# Altium PCB boosterboard.PcbDoc
Units mil, origin at the board's own origin, x right, y up, seen from the top; angles counter-clockwise.
Board outline 6000 x 4000 mil, 2 copper layers (Top Layer, Bottom Layer); 68 components, 50 nets, 173 pads, 0 vias.
Unrouted connection lines stored in the file: 86.
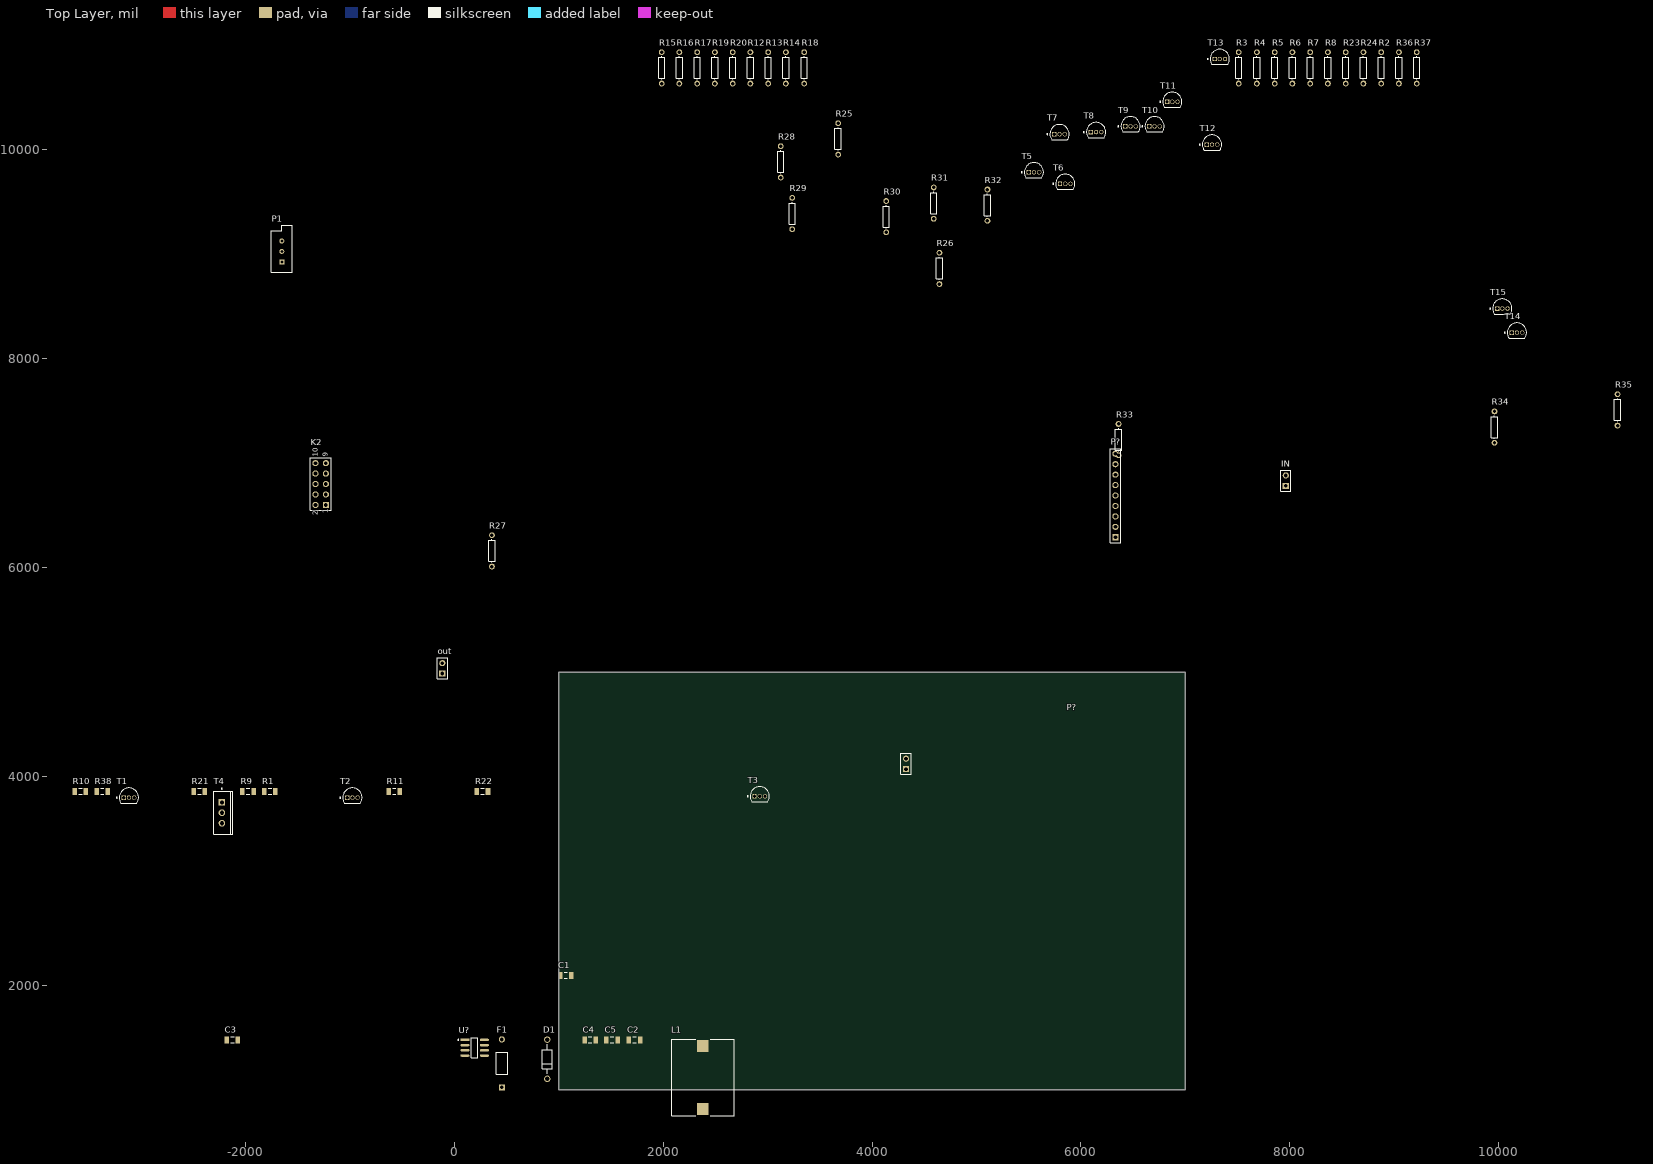
[diagram p0: Top Layer view]
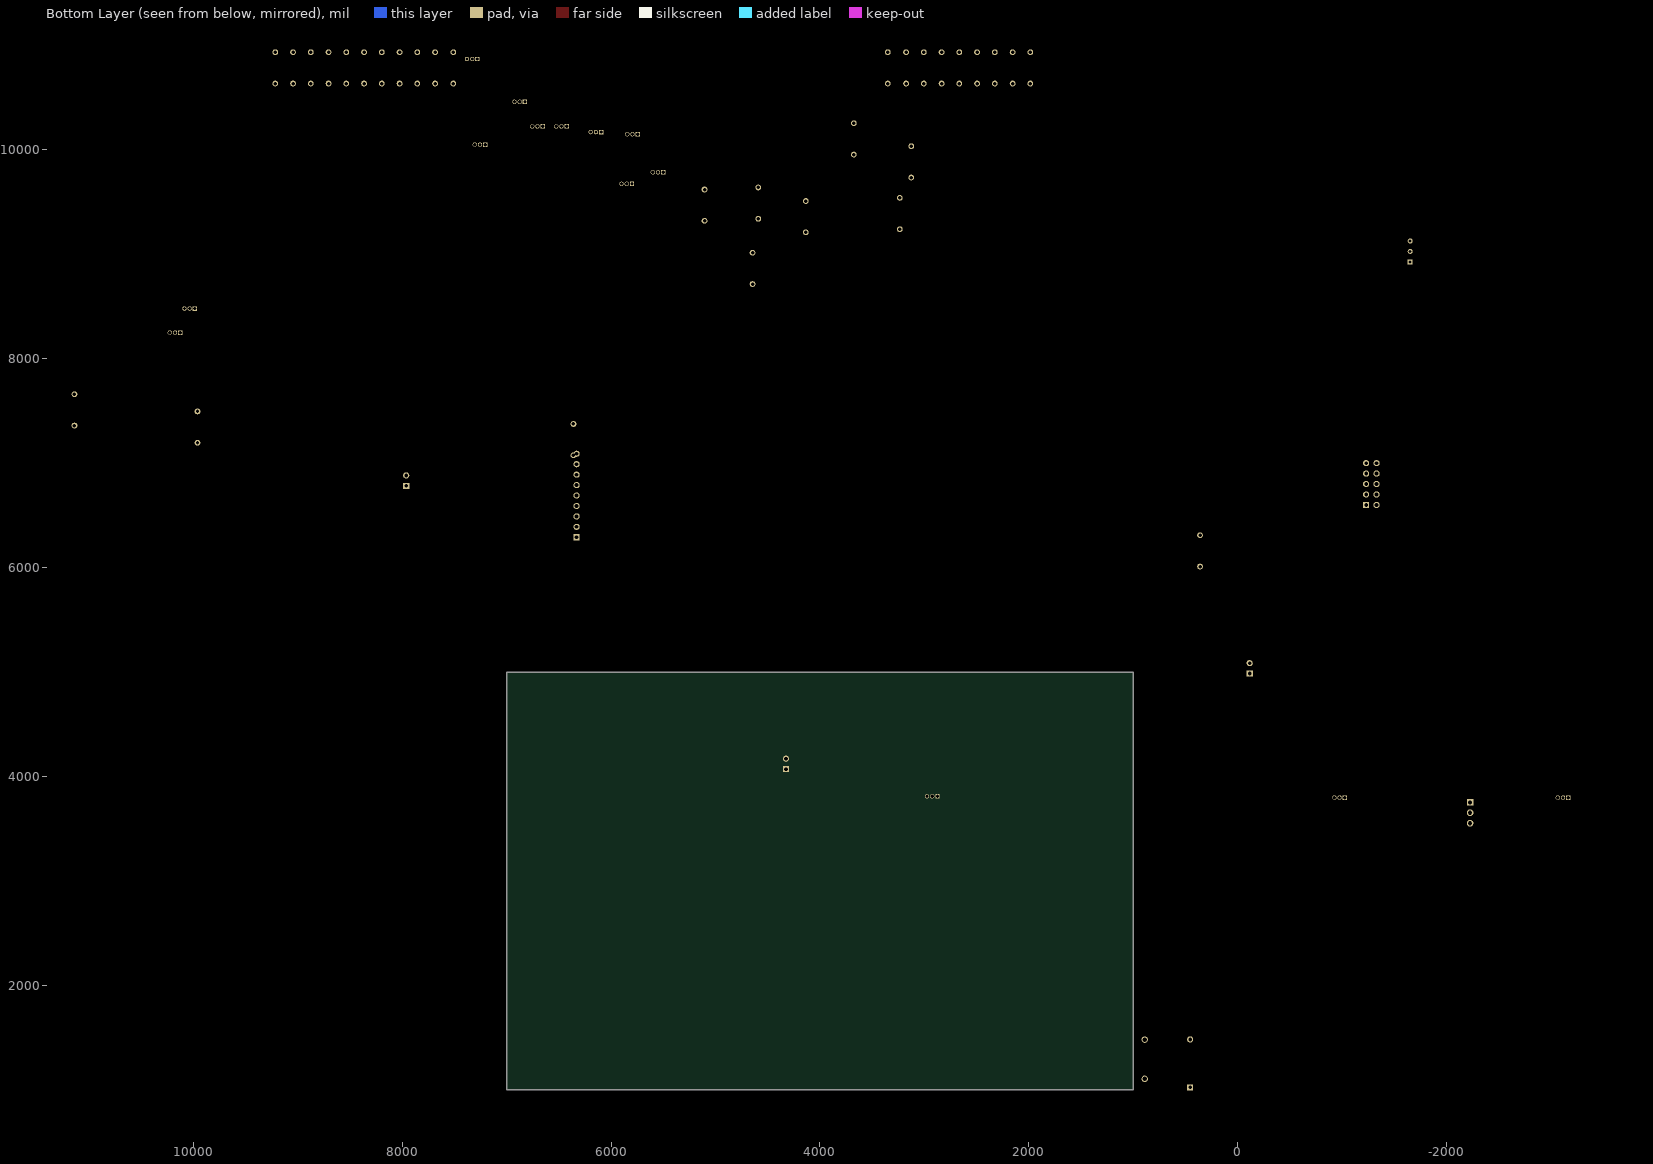
[diagram p1: Bottom Layer view, seen from below]

## Layer stack, top to bottom
Top Solder: solder mask 0.4, Solder Resist, Dk 3.5
Top Layer: signal copper 1.4
Dielectric 1: dielectric 12.6, FR-4, Dk 4.8
Bottom Layer: signal copper 1.4
Bottom Solder: solder mask 0.4, Solder Resist, Dk 3.5

## Board outline
1000,1000 7000,1000 7000,5000 1000,5000

## Design rules (kind name [scope] priority, off if disabled: settings)
Clearance [All] p1: gap=10 ignorepadtopadclearanceinfootprint=FALSE except(0: Arc-Hole Track-Hole SMDPad-Hole THPad-Hole Via-Hole Fill-Hole Poly-Hole Region-Hole Text-Hole)
PolygonConnect [All] p1: connectstyle=Relief reliefconductorwidth=10 reliefentries=4 polygonreliefangle="90 Angle" airgapwidth=10
RoomDefinition boosterdeel2 [InComponentClass('boosterdeel2')] p1: confinementstyle=ConfineIn formatcopy=TRUE lockcomponents=FALSE outline 8593.15,9165 17448.15,9165 17448.15,10810 8593.15,10810
RoomDefinition booster12-70v [InComponentClass('booster12-70v')] p2: confinementstyle=ConfineIn formatcopy=TRUE lockcomponents=FALSE outline 0,1420 8855,1420 8855,3400 0,3400
RoutingVias [All] p1: holewidth=28 width=50 viastyle="Through Hole" minholewidth=28 minwidth=50 maxholewidth=28 maxwidth=50
SolderMaskExpansion [All] p1: expansion=4 istentingtop=FALSE
Width [All] p1: maxlimit=10 minlimit=10 preferedwidth=10
30 further rules are at their usual default settings.

## Classes and differential pairs
component class boosterdeel2: IN P1 R2 R3 R4 R5 R6 R7 R8 R12 R13 R14 R15 R16 R17 R18 R19 R20 R23 R24 R25 R26 R28 R29 R30 R31 R32 R33 R34 R35 R36 R37 T5 T6 T7 T8 T9 T10 T11 T12 T13 T14 T15
component class booster12-70v: C2 C3 C4 C5 D1 F1 IN L1 out P1 R1 R9 R10 R11 R21 R22 R38 T1 T2 T4 U?

## Components (designator, comment, footprint, x,y, rotation, side; value= is the part's Value field where it differs from the comment)
C1 "Cap Semi" C1206 1066.85,2095 r0 top value=330p
C2 "Cap Semi" C1206 1725,1477.44 r0 top value=100n
C3 "Cap Semi" C1206 -2125,1477.44 r0 top value=4u7
C4 "Cap Semi" C1206 1300,1477.44 r0 top value=470u
C5 "Cap Semi" C1206 1510,1477.44 r0 top value=470u
D1 "MUR160G" ONSC-AXIAL_LEAD-2-59-10_P 890,1292.44 r90 top
F1 "Fuse 1" PIN-W2/E2.8 455,1252.44 r90 top
IN "Header 2" HDR1X2 7961.3,6782.44 r90 top
K2 "Header 5X2" HDR2X5 -1230,6600 r90 top
L1 "74459147" WE-PD3-X 2380,1117.44 r90 top
out "Header 2" HDR1X2 -115,4985 r90 top
P1 "RPot" VR5 -1651.85,9027.44 r90 top value=5k
P? "Header 2" HDR1X2 4325,4070 r90 top
P? "Header 9" HDR1X9 6330,6290 r90 top
R1 "Res1" C1206 -1765.85,3857.44 r0 top value=1K
R2 "Res1" AXIAL-0.3 8875,10785 r90 top value=1K
R3 "Res1" AXIAL-0.3 7510,10785 r90 top value=1K
R4 "Res1" AXIAL-0.3 7685,10785 r90 top value=1K
R5 "Res1" AXIAL-0.3 7855,10785 r90 top value=1K
R6 "Res1" AXIAL-0.3 8025,10785 r90 top value=1K
R7 "Res1" AXIAL-0.3 8195,10785 r90 top value=1K
R8 "Res1" AXIAL-0.3 8365,10785 r90 top value=1K
R9 "Res1" C1206 -1975.85,3857.44 r0 top value=2k2
R10 "Res1" C1206 -3580.85,3857.44 r0 top value=2k2
R11 "Res1" C1206 -575.85,3857.44 r0 top value=3k3
R12 "Res1" AXIAL-0.3 2835,10785 r90 top value=1K
R13 "Res1" AXIAL-0.3 3005,10785 r90 top value=1K
R14 "Res1" AXIAL-0.3 3175,10785 r90 top value=1K
R15 "Res1" AXIAL-0.3 1985,10785 r90 top value=1K
R16 "Res1" AXIAL-0.3 2155,10785 r90 top value=1K
R17 "Res1" AXIAL-0.3 2325,10785 r90 top value=1K
R18 "Res1" AXIAL-0.3 3350,10785 r90 top value=1K
R19 "Res1" AXIAL-0.3 2495,10785 r90 top value=1K
R20 "Res1" AXIAL-0.3 2665,10785 r90 top value=1K
R21 "Res1" C1206 -2440.85,3857.44 r0 top value=27k
R22 "Res1" C1206 269.15,3857.44 r0 top value=27k
R23 "Res1" AXIAL-0.3 8535,10785 r90 top value=1K
R24 "Res1" AXIAL-0.3 8705,10785 r90 top value=1K
R25 "Res1" AXIAL-0.3 3675,10105 r90 top value=1K
R26 "Res1" AXIAL-0.3 4645,8865 r90 top value=1K
R27 "Res1" AXIAL-0.3 360,6160 r90 top value=1K
R28 "Res1" AXIAL-0.3 3125,9885 r90 top value=1K
R29 "Res1" AXIAL-0.3 3235,9390 r90 top value=1K
R30 "Res1" AXIAL-0.3 4135,9360 r90 top value=1K
R31 "Res1" AXIAL-0.3 4590,9490 r90 top value=1K
R32 "Res1" AXIAL-0.3 5105,9470 r90 top value=1K
R33 "Res1" AXIAL-0.3 6360,7225 r90 top value=1K
R34 "Res1" AXIAL-0.3 9960,7345 r90 top value=1K
R35 "Res1" AXIAL-0.3 11138.15,7510 r90 top value=1K
R36 "Res1" AXIAL-0.3 9045,10785 r90 top value=1K
R37 "Res1" AXIAL-0.3 9215,10785 r90 top value=1K
R38 "Res1" C1206 -3370.85,3857.44 r0 top value=390k
T1 "BC547B" ONSC-TO-92-3-29-11 -3115.85,3797.44 r0 top
T2 "BC639" ONSC-TO-92-3-29-11 -975.85,3797.44 r0 top
T3 "BC640-016G" ONSC-TO-92-3-29-11 2925,3810 r0 top
T4 "IPP200N15N3 G" INF-PG-TO220-3-1_A_V -2225.85,3652.44 r0 top
T5 "MPSA42" ONSC-TO-92-3-29-11 5550,9785 r0 top
T6 "MPSA42" ONSC-TO-92-3-29-11 5850,9675 r0 top
T7 "MPSA42" ONSC-TO-92-3-29-11 5795,10150 r0 top
T8 "MPSA42" ONSC-TO-92-3-29-11 6145,10170 r0 top
T9 "MPSA42" ONSC-TO-92-3-29-11 6475,10225 r0 top
T10 "MPSA42" ONSC-TO-92-3-29-11 6705,10225 r0 top
T11 "MPSA42" ONSC-TO-92-3-29-11 6875,10460 r0 top
T12 "MPSA42" ONSC-TO-92-3-29-11 7255,10050 r0 top
T13 "MPSA42" ONSC-TO-92-3-29-11 7330,10870 r0 top
T14 "MPSA92" ONSC-TO-92-3-29-11 10175,8250 r0 top
T15 "MPSA92" ONSC-TO-92-3-29-11 10035,8480 r0 top
U? "ICM7555CBAZ-T" FP-M8_15-IPC_B 195,1402.44 r0 top

## Footprints (in the part's own frame and the unit in brackets; to place one, negate y for a bottom-side part, rotate by r counter-clockwise, add the part's x,y. Pads: shape width x height; smd on the part's side, far side on the other; paste and mask are expansions set on the pad)
AXIAL-0.3 [mm] "Axial Device, Thru-Hole; 2 Leads; 0.3 in Pin Spacing"
  round 1.4 hole 0.85: 1(-3.81,0) 2(3.81,0)
  silkscreen extent -2.77,-0.76 2.77,0.76
C1206 [mm] "Chip Capacitor, Body 3.2x1.6mm, IPC High Density"
  rect 1.1x1.7 smd: 1(-1.35,0) 2(1.35,0)
  silkscreen extent -0.4,-0.75 0.4,0.75, body extent -1.7,-0.9 1.7,0.9, height 1.3
FP-M8_15-IPC_B [mil]
  rect 85.59x22.97 smd paste+0 mask+0: 1(-93.15,75)
  rrect100% 85.59x22.97 smd paste+0 mask+0: 2(-93.15,25) 3(-93.15,-25) 4(-93.15,-75) 5(93.15,-75) 6(93.15,-25) 7(93.15,25) 8(93.15,75)
  silkscreen extent -161,-96 31,96, body extent -146,-106 146,106, height 10
HDR1X2 [mm] "Connector; Header; 2 Position"
  rect 1.5x1.5 hole 0.9: 1(0,0)
  round 1.5 hole 0.9: 2(2.54,0)
  silkscreen extent -1.27,-1.27 3.81,1.27
HDR1X9 [mm] "Connector; Header; 9 Position"
  rect 1.5x1.5 hole 0.9: 1(0,0)
  round 1.5 hole 0.9: 2(2.54,0) 3(5.08,0) 4(7.62,0) 5(10.16,0) 6(12.7,0) 7(15.24,0) 8(17.78,0) 9(20.32,0)
  silkscreen extent -1.27,-1.27 21.59,1.27
HDR2X5 [mm] "Connector; Header; 5x2 Position"
  rect 1.5x1.5 hole 0.9: 1(0,0)
  round 1.5 hole 0.9: 2(0,2.54) 3(2.54,0) 4(2.54,2.54) 5(5.08,0) 6(5.08,2.54) 7(7.62,0) 8(7.62,2.54) 9(10.16,0) 10(10.16,2.54)
  silkscreen extent -1.27,-1.27 11.43,3.81
INF-PG-TO220-3-1_A_V [mm] "FM, 3-Leads, Body 10.03x8.98mm, Pitch 2.54mm"
  rect 1.6x1.6 hole 1: 1(0,2.54)
  round 1.6 hole 1: 2(0,0) 3(0,-2.54)
  silkscreen extent -1.93,-5.2 2.67,5.97, body extent -1.93,-5.2 2.67,5.2, height 20.75
ONSC-AXIAL_LEAD-2-59-10_P [mm] "AXIAL, 2-Leads, Diameter 2.35mm"
  round 1.55 hole 1.05: 1(-4.77,0) 2(4.77,0)
  silkscreen extent -3.59,-1.17 3.59,1.17
ONSC-TO-92-3-29-11 [mm] "TO, 3-Leads, Body Dia 4.7mm, Pitch 1.27mm"
  rect 1.05x1.05 hole 0.8: 1(-1.27,0)
  round 1.05 hole 0.8: 2(0,0) 3(1.27,0)
  silkscreen extent -3.07,-1.34 2.35,2.35, body extent -2.35,-1.33 2.36,2.36, height 7.87
PIN-W2/E2.8 [mm] "Thru-Hole; 2 Leads"
  rect 1.5x1.5 hole 0.9: 1(-5.825,0)
  round 1.5 hole 0.9: 2(5.825,0)
  silkscreen extent -2.65,-1.4 2.65,1.4
VR5 [mm] "Thru-Hole; 3 Leads"
  rect 1.2x1.2 hole 0.7: 1(-2.54,0)
  round 1.2 hole 0.7: 2(0,0) 3(2.54,0)
  silkscreen extent -5.08,-2.54 6.35,2.54
WE-PD3-X [mm] "SMD Inductor, 2-Leads, Body 18.54 x 15.24 mm"
  rect 2.92x2.79 smd: 1(-7.685,0) 2(7.685,0)
  silkscreen extent -9.3,-7.6 9.3,7.6, body extent -9.27,-7.64 9.27,7.6, height 7.61

## Part data
C1 C2 C3 C4 C5: "Capacitor (Semiconductor SIM Model)", LatestRevisionDate=29-May-2009, LatestRevisionNote="IPC-7351 Footprint Added.", PackageDescription="Chip Capacitor", PackageReference=C1206, Published=8-Jun-2000, Publisher="Altium Limited"
D1: library part CMP-0902-00129-1, "SWITCHMODE(TM) Power Rectifier, 2-Pin Axial_Lead, Pb-Free, Bulk Bag", Manufacturer="On Semiconductor", ComponentLink1Description="Manufacturer URL", ComponentLink1URL=http://www.onsemi.com/, ComponentLink2Description=Datasheet, ComponentLink2URL=http://www.onsemi.com/pub_link/Collateral/MUR120-D.PDF, ComponentLink3Description="Package Specification", ComponentLink3URL=http://www.onsemi.cn/pub_link/Collateral/59-10.PDF, DatasheetVersion="Rev. 12", IFSM Max (A)=35, Mounting Technology="Through Hole", PackageDescription="2-Pin, Axial Lead, Diameter 2.35 mm", PackageReference=AXIAL_LEAD-2-59-10, PackageVersion="Rev. U, 02/2005", Packing="Bulk Bag", PartNumber=MUR160G, RoHS=TRUE, Type=Ultrafast, VRRM Max (V)=600
F1: "Fuse", LatestRevisionDate=17-Jul-2002, LatestRevisionNote="Re-released for DXP Platform.", PackageDescription="Thru-Hole; 2 Leads", PackageReference=PIN-W2/E2.8, Published=8-Jun-2000, Publisher="Altium Limited"
IN out P?: "Header, 2-Pin", LatestRevisionDate=17-Jul-2002, LatestRevisionNote="Re-released for DXP Platform.", Publisher="Altium Limited"
K2: "Header, 5-Pin, Dual row", LatestRevisionDate=17-Jul-2002, LatestRevisionNote="Re-released for DXP Platform.", Publisher="Altium Limited"
L1: library part CMP-0227-00841-1, "SMD Shielded Power Inductor WE-PD3, L = 47.0 µH", Inductance="47.0 ÂµH", ComponentLink1Description="Manufacturer Link", ComponentLink1URL=http://www.we-online.com, ComponentLink2Description=Datasheet, ComponentLink2URL=http://www.we-online.de/katalog/media/pdf/74459147.pdf, DatasheetVersion="ver 1, Oct-2004", PackageDescription="SMD Inductor, 2-Leads, Body 18.54 x 15.24 mm", PackageReference=WE-PD3-X, PackageVersion=2004
P1: "Potentiometer", LatestRevisionDate=17-Jul-2002, LatestRevisionNote="Re-released for DXP Platform.", PackageDescription="Variable Resistor, Thru-Hole; 3 Leads", PackageReference=VR5, Published=8-Jun-2000, Publisher="Altium Limited", Set Position=0.5, Sim Note="Enter the Resistance value and the set point into parameter fields."
P?: "Header, 9-Pin", LatestRevisionDate=17-Jul-2002, LatestRevisionNote="Re-released for DXP Platform.", Publisher="Altium Limited"
R1 R2 R3 R4 R5 R6 R7 R8 R9 R10 R11 R12 R13 R14 R15 R16 R17 R18 R19 R20 R21 R22 R23 R24 R25 R26 R27 R28 R29 R30 R31 R32 R33 R34 R35 R36 R37 R38: "Resistor", LatestRevisionDate=17-Jul-2002, LatestRevisionNote="Re-released for DXP Platform.", PackageDescription="Axial Device, Thru-Hole; 2 Leads; 0.3 in Pin Spacing", PackageReference=AXIAL-0.3, Published=8-Jun-2000, Publisher="Altium Limited"
T1: library part CMP-1048-01467-1, "Amplifier Transistor, NPN Silicon, 3-Pin TO-92, Bulk Box", Manufacturer="On Semiconductor", ComponentLink1Description="Manufacturer URL", ComponentLink1URL=http://www.onsemi.com/, ComponentLink2Description=Datasheet, ComponentLink2URL=http://www.onsemi.com/pub_link/Collateral/BC546-D.PDF, ComponentLink3Description="Package Specification", ComponentLink3URL=http://www.onsemi.cn/pub_link/Collateral/2N6426-D.PDF, DatasheetVersion="Rev. 7", fT Min (MHz)=150, IC Continuous (A)=0.1, Mounting Technology="Through Hole", PackageDescription="3-Pin Transistor Outline, Body 4.825 x 3.685 mm, Pitch 1.27 mm", PackageReference=TO-92-3-29-11_AM_SL, PackageVersion="Rev. AM", Packing="Bulk Box", PartNumber=BC547B, Polarity=NPN, RoHS=FALSE
T2: library part CMP-1048-01471-1, "High Current Transistor, NPN Silicon, 3-Pin TO-92, Bulk Box", Manufacturer="On Semiconductor", ComponentLink1Description="Manufacturer URL", ComponentLink1URL=http://www.onsemi.com/, ComponentLink2Description=Datasheet, ComponentLink2URL=http://www.onsemi.com/pub_link/Collateral/BC635-D.PDF, ComponentLink3Description="Package Specification", ComponentLink3URL=http://www.onsemi.cn/pub_link/Collateral/2N6426-D.PDF, DatasheetVersion="Rev. 1", IC Continuous (A)=1, Mounting Technology="Through Hole", PackageDescription="3-Pin Transistor Outline, Body 4.825 x 3.685 mm, Pitch 1.27 mm", PackageReference=TO-92-3-29-11_AM_SL, PackageVersion="Rev. AM", Packing="Bulk Box", PartNumber=BC639, Polarity=NPN, RoHS=FALSE
T3: library part CMP-1048-01475-1, "High Current Transistor, PNP Silicon, 3-Pin TO-92, Pb-Free, Bulk Box", Manufacturer="On Semiconductor", ComponentLink1Description="Manufacturer URL", ComponentLink1URL=http://www.onsemi.com/, ComponentLink2Description=Datasheet, ComponentLink2URL=http://www.onsemi.com/pub_link/Collateral/BC640-D.PDF, ComponentLink3Description="Package Specification", ComponentLink3URL=http://www.onsemi.cn/pub_link/Collateral/2N6426-D.PDF, DatasheetVersion="Rev. 1", IC Continuous (A)=-0.5, Mounting Technology="Through Hole", PackageDescription="3-Pin Transistor Outline, Body 4.825 x 3.685 mm, Pitch 1.27 mm", PackageReference=TO-92-3-29-11_AM_SL, PackageVersion="Rev. AM", Packing="Bulk Box", PartNumber=BC640-016G, Polarity=PNP, RoHS=TRUE
T4: library part CMP-1091-00080-1, "N-Channel OptiMOS 3 Power-Transistor, 150 V VDS, 50 A ID, -55 to 175 degC, PG-TO220-3-1, Tube, Green", Manufacturer=Infineon, ComponentLink1Description="Manufacturer URL", ComponentLink1URL=http://www.infineon.com/, ComponentLink2Description=Datasheet, ComponentLink2URL=http://www.infineon.com/dgdl/IPD200N15N3_Rev25.pdf?folderId=db3a304313b8b5a60113cee8763b02d7&fileId=db3a30432313ff5e01239a0457643bbc, ComponentLink3Description="Package Specification", ComponentLink3URL=http://www.infineon.com/dgdl/IPP028N08N3_Rev1%5B1%5D.0.pdf?folderId=db3a304313b8b5a60113cee8763b02d7&fileId=db3a30432313ff5e0123a3c08e7326b5, DatasheetVersion="Rev. 2.05", Green=TRUE, Halogen-free=TRUE, ID (max)="50Â A", IDpuls (max)="200Â A", Mounting Technology="Through Hole", PackageDescription="3-Pin Plastic (Green) Transistor Single Outline Package, 10.03 x 8.98 mm Body, 2.54 mm Pitch", PackageReference=PG-TO220-3-1, PackageVersion="Rev. 05, 08/2007", Packing=Tube, PartNumber="IPP200N15N3 G", Polarity=N, Ptot (max)="150Â W", QG="23Â nC", RDS (on) (max)="20Â mOhm", Rth="1Â K/W", RthJA (max)="75 K/W", RthJC (max)="1Â K/W", VDS (max)="150Â V", VGS(th) (max)="4Â V", VGS(th) (min)="2Â V"
T5 T6 T7 T8 T9 T10 T11 T12 T13: library part CMP-1048-01390-1, "High Voltage Transistor, NPN Silicon, 3-Pin TO-92, Bulk Box", Manufacturer="On Semiconductor", ComponentLink1Description="Manufacturer URL", ComponentLink1URL=http://www.onsemi.com/, ComponentLink2Description=Datasheet, ComponentLink2URL=http://www.onsemi.cn/pub_link/Collateral/MPSA42-D.PDF, ComponentLink3Description="Package Specification", ComponentLink3URL=http://www.onsemi.cn/pub_link/Collateral/2N6426-D.PDF, DatasheetVersion="Rev. 8", fT Min (MHz)=50, IC Continuous (A)=0.5, Mounting Technology="Through Hole", Note1=0, PackageDescription="3-Pin Transistor Outline, Body 4.825 x 3.685 mm, Pitch 1.27 mm", PackageReference=TO-92-3-29-11_AM_SL, PackageVersion="Rev. AM", Packing="Bulk Box", PartNumber=MPSA42, Polarity=NPN, RoHS=FALSE
T14 T15: library part CMP-1048-01411-1, "High Voltage Transistor, PNP Silicon, 3-Pin TO-92, Bulk Box", Manufacturer="On Semiconductor", ComponentLink1Description="Manufacturer URL", ComponentLink1URL=http://www.onsemi.com/, ComponentLink2Description=Datasheet, ComponentLink2URL=http://www.onsemi.cn/pub_link/Collateral/MPSA92-D.PDF, ComponentLink3Description="Package Specification", ComponentLink3URL=http://www.onsemi.cn/pub_link/Collateral/2N6426-D.PDF, DatasheetVersion="Rev. 6", fT Min (MHz)=50, IC Continuous (A)=-0.5, Mounting Technology="Through Hole", PackageDescription="3-Pin Transistor Outline, Body 4.825 x 3.685 mm, Pitch 1.27 mm", PackageReference=TO-92-3-29-11_AM_SL, PackageVersion="Rev. AM", Packing="Bulk Box", PartNumber=MPSA92, Polarity=PNP, RoHS=FALSE
U?: library part CMP-13501-000001-1, "IC OSC SINGLE TIMER 1MHZ 8-SOIC"

## Nets (pads, with @x,y where several pads share a name; then routed paths per layer and width w, separated by ;. In a path a pad name is that pad's centre, name@x,y a point inside that pad or via, vN(x,y) a via of type N, cw(c..) or ccw(c..) an arc to the next point about the centre after c; other vN are vias at no path point)
+70: IN.1 R34.2 R35.2 T14.1 T15.1
GND: C1.1 C2.1 C3.1 C3.2 C4.1 C5.1 D1.1 IN.2 K2.10 out.1 out.2 P1.2 P?.1@4325,4070 R10.2 R19.2 R25.1 R26.1 R27.1 R28.1 R29.1 R30.1 R31.1 R32.1 R32.2 R33.1 R36.1 R37.1 R38.1 R38.2 T1.2 T1.3 T3.1 T4.3 T5.1 T6.1 T7.1 T8.1 T9.1 T10.1 T11.1 T12.1 T12.2 T13.1 U?.1
NetC1_2: C1.2 R21.1 U?.2 U?.6
NetD1_2: D1.2 L1.2 T4.2
NetF1_1: F1.1 P?.2@4325,4170
NetK2_1: K2.1 R12.1
NetK2_2: K2.2 R13.1
NetK2_3: K2.3 R14.1
NetK2_4: K2.4 R15.1
NetK2_5: K2.5 R16.1
NetK2_6: K2.6 R17.1
NetK2_7: K2.7 R18.1
NetK2_8: K2.8 R19.1
NetK2_9: K2.9 R20.1
NetP1_1: P1.1 R10.1
NetP?_1: P?.1@6330,6290 R2.2
NetP?_2: P?.2@6330,6390 R3.2
NetP?_3: P?.3 R4.2
NetP?_4: P?.4 R5.2
NetP?_5: P?.5 R6.2
NetP?_6: P?.6 R7.2
NetP?_7: P?.7 R8.2
NetP?_8: P?.8 R36.2 T15.3
NetP?_9: P?.9 R37.2 T14.3
NetR1_1: R1.1 T2.1 T3.2
NetR1_2: R1.2 T4.1
NetR2_1: R2.1 T5.3
NetR3_1: R3.1 T6.3
NetR4_1: R4.1 T7.3
NetR5_1: R5.1 T8.3
NetR6_1: R6.1 T9.3
NetR7_1: R7.1 T10.3
NetR8_1: R8.1 T11.3
NetR9_1: R9.1 U?.3
NetR9_2: R9.2 T2.3 T3.3
NetR11_1: R11.1 R21.2 U?.7
NetR12_2: R12.2 R25.2 T5.2
NetR13_2: R13.2 R26.2 T6.2
NetR14_2: R14.2 R27.2 T7.2
NetR15_2: R15.2 R28.2 T8.2
NetR16_2: R16.2 R29.2 T9.2
NetR17_2: R17.2 R30.2 T10.2
NetR18_2: R18.2 R31.2 T11.2
NetR20_2: R20.2 R33.2 T13.2
NetR22_1: R22.1 T1.1 U?.5
NetR23_1: R23.1 T12.3
NetR23_2: R23.2 R34.1 T15.2
NetR24_1: R24.1 T13.3
NetR24_2: R24.2 R35.1 T14.2
VCC: C2.2 C4.2 C5.2 F1.2 L1.1 R11.2 R22.2 T2.2 U?.4 U?.8
pads on no net: P1.3

## Text inside footprints (layer, text, board x,y; h text height)
K2: Top Overlay "10" at -1310,7060 h50 r90; Top Overlay "9" at -1210,7060 h50 r90; Top Overlay "1" at -1210,6520 h50 r90; Top Overlay "2" at -1310,6500 h50 r90